# Altium PCB 主板-0915改综合.PcbDoc (part 3 of 3)
Units mm, origin at the board's own origin, x right, y up, seen from the top; angles counter-clockwise.
Board outline 97.69 x 103.45 mm, 2 copper layers (Top Layer, Bottom Layer); 78 components, 74 nets, 243 pads, 282 vias.
Unrouted connection lines stored in the file: 6.
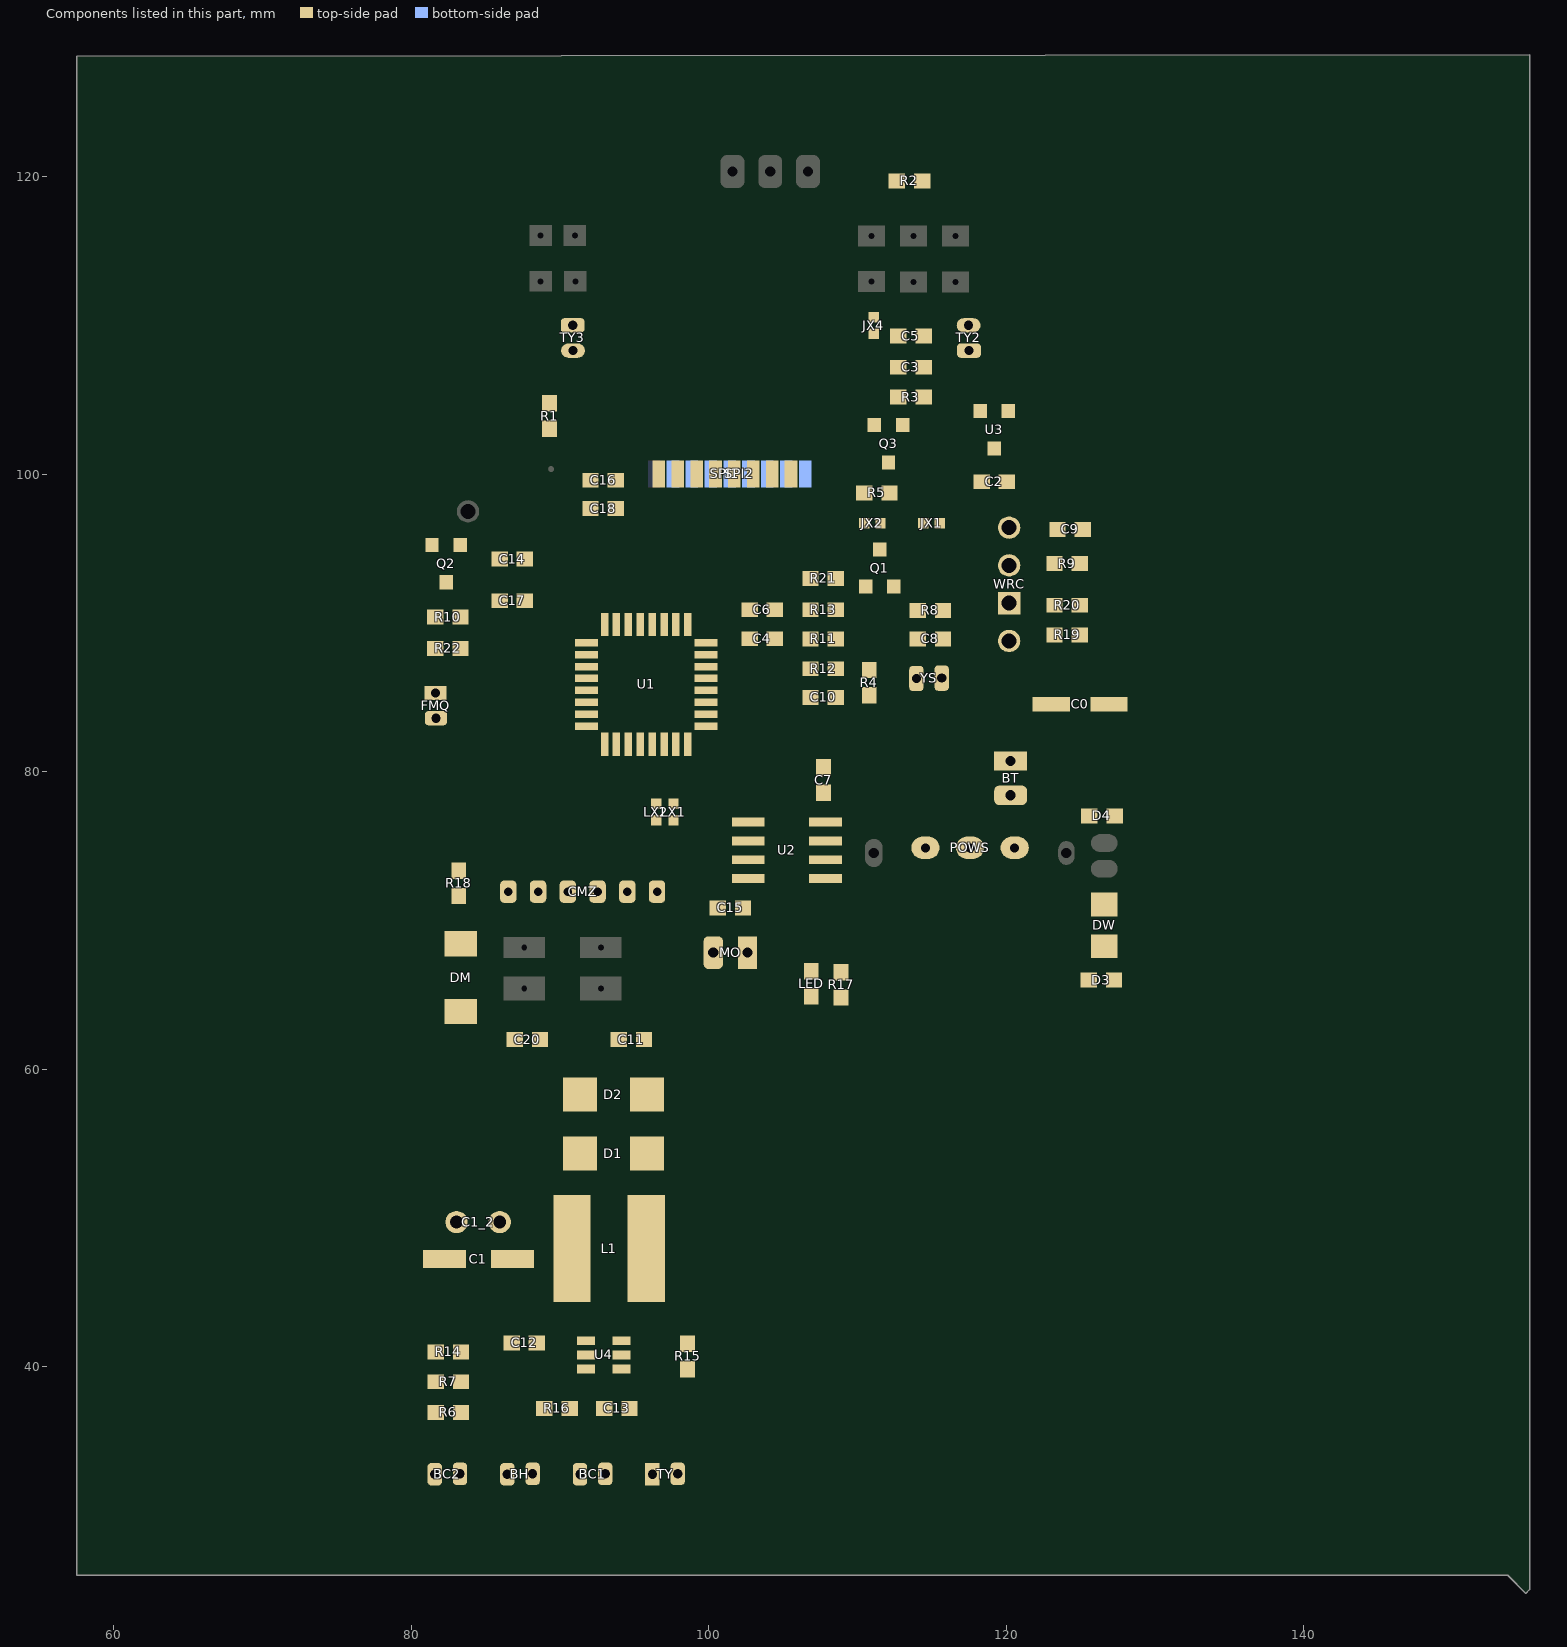
[diagram p3: the components of this part, seen from the top]

## Polygon pours and split planes (outlines as drawn)
GND on Bottom Layer "Top Layer-No Net" (solid, remove dead copper, pour order 3): 90.764,111.456 85.912,111.456 85.912,99.977 85.934,99.955 85.878,99.899 83.245,99.899 82.628,99.899 79.984,97.255 79.969,97.24 79.969,62.485 79.969,62.155 80.578,61.545 80.807,61.317 84.515,61.317 84.515,60.961 85.862,59.615 86.09,59.386 86.09,55.195 85.76,55.195 84.033,53.468 83.703,53.798 80.502,53.798 80.223,53.798 79.893,53.468 79.918,53.443 79.918,52.046 84.312,52.046 85.557,50.801 85.785,50.573 85.785,46.61 85.785,45.239 85.557,45.01 84.998,44.451 84.592,44.451 80.553,44.451 80.299,44.705 80.02,44.426 80.02,43.994 80.02,31.556 79.984,31.521 79.994,31.511 79.994,30.786 80.121,30.786 80.401,30.507 80.629,30.278 80.858,30.278 81.227,30.278 81.26,30.245 98.308,30.245 98.884,30.245 99.044,30.405 99.527,30.888 99.527,30.913 99.527,31.469 99.584,31.527 99.584,60.15 99.584,60.587 100.568,61.571 101.102,62.104 101.178,62.104 121.292,62.104 121.315,62.126 121.388,62.053 121.726,62.053 121.828,62.053 122.438,61.444 122.59,61.291 122.59,60.758 122.59,58.955 122.768,58.777 122.768,58.142 122.819,58.142 123.276,57.685 123.454,57.507 123.911,57.507 124.266,57.507 124.368,57.405 126.73,57.405 127.467,57.405 128.076,58.015 128.484,58.423 128.484,59.442 128.484,97.022 127.106,98.401 125.409,98.401 123.835,99.976 123.748,99.889 122.295,99.889 122.295,99.994 122.234,100.055 122.184,100.106 122.184,111.456 115.275,111.456 115.224,111.507 115.249,111.482 115.249,105.03 115.224,105.03 113.903,103.709 113.751,103.557 93.812,103.557 92.796,103.557 92.008,104.344 90.764,105.589 90.764,107.113 90.764,111.075 91.119,111.431
GND on Top Layer "Top Layer-No Net" (hatched 90Degree grid 0.508 track 0.254, remove dead copper, pour order 6): 99.619,34.976 79.978,34.976 80.003,35.001 80.003,46.05 85.414,46.05 85.464,46.101 85.49,46.126 85.49,50.825 85.49,50.876 85.388,50.978 85.16,51.206 81.985,51.206 81.883,51.206 81.146,50.47 81.146,49.682 81.146,48.641 80.003,48.641 80.003,53.823 80.054,53.873 80.308,54.127 80.308,54.153 84.22,54.153 84.474,54.407 86.455,56.388 86.531,56.388 86.531,59.588 86.379,59.741 85.21,60.909 83.89,60.909 80.664,60.909 79.978,61.595 80.019,61.636 80.019,78.267 80.019,78.628 80.207,78.816 80.22,78.829 80.581,78.829 83.018,78.829 83.019,78.83 83.019,81.36 80.675,81.36 80.644,81.39 80.628,81.407 80.359,81.407 80.359,81.483 80.029,81.813 80.019,81.823 80.019,82.006 80.019,97.28 81.453,98.713 83.178,98.713 83.178,98.806 84.194,99.822 84.402,100.03 86.019,100.03 86.019,112.141 86.857,112.979 90.189,112.979 90.189,105.385 92.119,103.454 92.373,103.708 111.398,103.708 113.1,103.708 114.725,105.334 114.801,105.41 114.801,112.319 122.193,112.319 122.294,112.42 122.33,112.385 122.33,99.913 123.88,99.913 125.114,98.679 125.342,98.45 127.019,98.45 127.115,98.45 128.519,97.047 128.568,96.997 128.568,82.118 128.568,81.712 128.467,81.61 128.238,81.382 128.136,81.382 125.521,81.382 125.499,81.36 125.499,78.86 127.751,78.86 127.781,78.83 127.794,78.816 128.263,78.816 128.263,78.715 128.492,78.486 128.519,78.459 128.519,78.147 128.519,65.175 128.543,65.151 127.959,64.567 123.666,64.567 123.539,64.694 121.964,63.119 121.964,62.154 120.008,62.154 119.958,62.103 119.907,62.154 101.289,62.154 100.577,62.154 99.917,61.493 99.619,61.195 99.619,60.174 99.619,35.001

## Keep-outs
Keep-Out Layer:
  circle w0.1: c82.557,57.679 r1.45
  circle w0.1: c119.262,119.579 r1.45
  circle w0.1: c89.13,119.579 r1.45
  lines w0.1: 80,58.793 80,78.216 cw(c80.562,78.216) 80.562,78.778 ; 80,59.154 80,31.494 ccw(c81.276,31.494) 81.276,30.218 98.326,30.218 ccw(c98.318,31.5) 99.6,31.5 99.6,60.123 cw(c101.577,60.123) 101.577,62.1 121.53,62.1 cw(c121.53,60.884) 122.746,60.884 122.746,59.436 ccw(c124.8,59.436) 124.8,57.382 ; 80,81.955 80,97.229 85.95,99.929 86,99.979 86,119.634 cw(c88.245,119.634) 88.245,121.879 ; 80.01,81.955 ccw(c80.626,81.955) 80.626,81.339 ; 80.562,78.779 83,78.779 ; 80.626,81.339 83,81.339 ; 83,78.809 83,81.309 ; 88.195,121.879 90.922,121.879 92.431,120.371 99.187,120.371 100.695,121.879 107.458,121.879 108.737,120.599 111.76,120.599 113.04,121.879 120.141,121.879 ; 94.25,66.232 86.1,66.232 86.1,67.462 94.25,67.462 ; 94.3,66.232 94.3,67.462 ; 119.941,121.879 cw(c119.941,119.57) 122.25,119.57 122.25,100.029 122.311,99.862 128.5,96.996 128.5,81.869 ; 124.8,57.382 126.467,57.382 ccw(c126.467,59.415) 128.5,59.415 128.5,78.096 ; 125.48,78.809 125.48,81.309 ; 125.495,78.779 127.787,78.779 ; 125.495,81.339 127.94,81.339 ccw(c127.94,81.899) 128.5,81.899 ; 127.787,78.779 cw(c127.787,78.066) 128.5,78.066 ; 87.757,113.673 87.757,115.333 91.825,115.333 91.825,113.673 87.757,113.673 ; 93.218,106.274 94.005,105.486 107.442,105.486 108.356,106.401 108.356,117.043 107.239,118.161 94.082,118.161 93.218,117.297 93.218,106.274 ; 109.728,113.673 109.728,115.333 118.085,115.333 118.085,113.673 109.728,113.673
  lines w0.15: 89.535,65.801 89.535,64.668 90.805,64.668 ; 119.236,67.555 119.685,67.107

## Other copper
Top Layer:
  rectangle net NetC4_1: 98.4,67.054 100.046,70.714
  rectangle net NetC4_1: 99.314,65.049 100.635,69.139
  rectangle net NetC4_1: 100.178,65.634 101.194,76.835
  rectangle net NetC4_2: 103.581,65.405 105.029,69.825
  rectangle net NetC4_2: 102.189,65.583 103.759,74.143
  rectangle net 8.4V: 120.32,67.589 122.346,75.566
  rectangle net 8.4V: 120.345,73.406 122.174,75.514
  rectangle net BT: 121.488,76.759 122.453,78.867
  rectangle net BT: 115.087,65.938 118.059,73.203
  rectangle net BT: 113.817,72.542 117.983,77.14
  rectangle net GND: 106.248,80.493 118.415,82.525
  rectangle net GND: 118.262,80.01 124.003,82.88
  rectangle net BT: 106.985,76.759 121.641,78.765
  rectangle net NetC4_1: 100.635,75.082 103.149,76.632
  rectangle net BT: 114.122,63.83 116.967,66.116
  rectangle net GND: 86.563,36.373 88.951,38.622
  rectangle net GND: 87.249,38.658 89.75,40.615
  rectangle net 5V: 86.258,51.664 87.884,54.381
  rectangle net GND: 101.6,77.902 105.125,81.686
  rectangle net 5V: 89.764,42.367 91.008,45.009
  rectangle net GND: 94.183,31.4 96.723,34.849
Bottom Layer:
  rectangle net GND: 100.381,79.781 101.638,80.645
  rectangle net GND: 99.873,78.562 101.625,80.315
  rectangle net GND: 101.346,78.562 105.207,81.61
  rectangle net GND: 109.118,64.338 112.624,66.116
  rectangle net GND: 110.109,64.338 112.624,72.187
  rectangle net BT: 115.214,66.98 117.983,69.266
  rectangle net GND: 85.95,43.917 88.138,55.093
  rectangle net NetC4_1: 98.273,67.513 98.781,68.428
  rectangle net NetC4_1: 98.654,66.98 100.99,68.834
  rectangle net NetC4_1: 100.279,66.167 100.94,70.51
  rectangle net NetC4_2: 102.159,68.123 103.683,71.399
  rectangle net NetC4_2: 102.21,65.862 105.131,69.393
  rectangle net GND: 85.788,39.751 89.484,41.453
  rectangle net BT: 115.087,68.758 117.907,72.822
  rectangle net 8.4V: 119.583,67.869 122.301,74.447
  rectangle net 8.4V: 120.32,73.406 122.606,75.717
  rectangle net BT: 114.833,73.914 117.704,77.572
  rectangle net GND: 104.572,79.223 106.172,81.432
  rectangle net GND: 105.639,80.315 121.488,82.499
  rectangle net BT: 106.832,77.013 121.742,78.842
  rectangle net GND: 106.07,100.432 107.798,102.464
  rectangle net GND: 86.106,63.373 88.951,64.643
  rectangle net GND: 89.023,37.059 91.08,40.437
  rectangle net GND: 87.173,36.322 94.59,43.104
  rectangle net GND: 87.325,41.91 92.481,62.992
  rectangle net GND: 91.262,51.283 94.894,63.703
  rectangle net GND: 94.234,42.164 95.25,52.502
  rectangle net GND: 82.448,51.308 86.589,53.086
  rectangle net GND: 84.201,52.375 87.579,54.153
  rectangle net GND: 85.344,52.984 88.722,54.762

## Silkscreen, mask and mechanical layers (free items; w line width, h text height)
Top Overlay:
  circle w0.16: c125.175,84.532 r2.5
  circle w0.18: c84.556,47.346 r3.15
  lines w0.16: 109.652,95.987 109.652,97.434 112.37,97.434 112.37,95.987 109.652,95.987 ; 110.338,108.737 110.338,111.277 111.836,111.277 111.836,108.737 110.338,108.737 ; 113.64,95.987 113.64,97.434 116.281,97.434 116.281,95.987 113.64,95.987
  lines w0.2: 94.894,102.006 94.894,105.08 ; 94.894,118.389 94.894,120.142 ; 107.29,101.776 107.29,105.029
  lines w0.22: 94.78,30.582 98.628,30.582 ; 117.096,63.629 120.5,63.629 ; 117.125,63.598 117.125,68.729 ; 117.125,68.727 111.121,68.727 111.121,76.116 123.999,76.116 ; 120.5,63.598 120.5,68.729 ; 120.525,68.729 123.973,68.727 123.973,76.116 ; 122.475,81.748 127.825,81.748 ; 122.475,81.823 122.475,85.95 123.778,87.253 ; 123.825,87.273 127.85,87.273 127.85,81.773 ; 127.85,81.779 127.875,81.804 ; 81.198,45.904 83.067,44.035 87.917,44.035 87.924,50.635 81.198,50.635 81.198,45.904
  text "G-" at 97.739,118.745 h1.3
  text "-R" at 108.331,118.72 h1.3
  text "BC2" at 92.837,116.586 h0.85 r90
  text "OUT1" at 87.325,116.103 h0.85 r90
  text "GND" at 119.482,113.335 h1 r90
  text "HWPOW" at 109.601,112.37 h0.9 r90
  text "BC1" at 87.376,111.938 h0.9 r90
  text "M1" at 92.354,99.314 h1.6
  text "GND" at 84.861,97.155 h0.9
  text "CE" at 99.67,96.698 h0.9 r90
  text "IRQ" at 106.045,95.936 h0.9 r90
  text "3V3" at 97.028,95.809 h0.9 r90
  text "GND" at 98.374,95.809 h0.9 r90
  text "SCK" at 102.184,95.733 h0.9 r90
  text "CSN" at 100.889,95.656 h0.9 r90
  text "MOSI" at 103.429,95.148 h0.9 r90
  text "MISO" at 104.699,95.047 h0.9 r90
  text "SWIM/FM" at 113.309,93.548 h0.8
  text "16" at 92.38,89.637 h0.7 r90
  text "RST" at 119.151,86.309 h0.8
  text "+" at 120.066,83.642 h1.8
  text "1" at 100.609,81.661 h0.8
  text "+" at 122.809,77.445 h2.5
  text "+" at 113.182,76.708 h2.5
  text "+" at 116.916,76.683 h2.5
  text "AM" at 90.957,73.889 h1 r90
  text "Y>" at 92.964,73.889 h1 r90
  text "GN" at 97.028,73.812 h1 r90
  text "3.3V" at 87.02,73.787 h1 r90
  text "Y30" at 88.951,73.787 h1 r90
  text "<Z" at 94.996,73.762 h1 r90
  text "NTC" at 125.552,73.381 h0.8 r90
  text "-" at 125.806,71.145 h2.3
  text "BAT" at 116.484,69.977 h1 r90
  text "8.4V" at 121.818,69.672 h1 r90
  text "SWIM" at 86.309,69.367 h0.8
  text "RST" at 91.796,69.291 h0.8
  text "+" at 96.19,64.999 h2
  text "5V" at 89.383,62.941 h1
  text "+" at 92.024,62.433 h2
  text "-" at 86.665,62.306 h2.2
  text "+" at 80.594,43.459 h2
  text "+" at 99.187,34.823 h1.5 r90
Bottom Overlay:
  circle w0.2: c84.497,49.733 r2.6
  lines w0.16: 95.021,101.776 95.021,105.181 ; 96.19,95.123 96.19,93.32 96.596,92.913 104.75,92.913 105.105,93.269 105.105,95.199 ; 97.46,95.199 97.46,93.751 97.485,93.726 106.553,93.726 106.655,93.828 106.655,95.275 ; 98.6,70.028 98.6,63.119 104.369,63.119 104.369,69.875 104.521,70.028 98.628,70.028 ; 106.756,101.879 106.756,105.054
  lines w0.25: 96.063,101.956 96.063,105.029 ; 108.001,101.802 108.001,105.054
  lines w0.254: 90.932,117.069 92.024,118.161 ; 91.592,110.846 92.685,111.938 ; 91.618,111.938 92.71,110.846
  text "-G" at 99.898,118.643 h1.2
  text "38BC2" at 95.021,118.593 h0.8
  text "R-" at 110.211,118.567 h1.2
  text "38OUT" at 87.401,118.186 h0.8 r90
  text "HWPOW" at 109.576,116.713 h0.9 r90
  text "GND" at 119.609,115.976 h1 r90
  text "38BC1" at 87.452,113.309 h0.8 r90
  text "FL" at 114.427,110.414 h1.2
  text "SCK" at 101.778,98.146 h0.9 r90
  text "GND" at 107.213,98.12 h0.9 r90
  text "IRQ" at 97.917,98.095 h0.9 r90
  text "3V3" at 105.664,98.095 h0.9 r90
  text "MISO" at 99.212,98.069 h0.9 r90
  text "CE" at 104.343,98.069 h0.9 r90
  text "CSN" at 103.048,98.044 h0.9 r90
  text "GND" at 96.698,98.019 h0.9 r90
  text "MOSI" at 100.482,97.993 h0.9 r90
  text "3.3" at 118.796,95.936 h1
  text "GND" at 83.058,95.021 h1 r90
  text "SWIM" at 118.847,93.32 h1
  text "GND" at 118.593,90.932 h1
  text "RST" at 118.415,88.265 h1
  text "YS" at 112.192,85.395 h1.5
  text "BT" at 121.031,84.531 h1.5 r90
  text "+" at 123.469,77.394 h2
  text "8.4V" at 121.133,73.254 h1 r90
  text "GND" at 125.654,72.568 h1 r270
  text "BT" at 117.018,71.984 h1.4
  text "GND" at 86.004,64.11 h1.15 r180
  text "MO" at 107.544,63.652 h1.5
  text "+" at 93.37,62.255 h2.2
  text "DC 5V" at 93.091,60.681 h1.2
  text "2000MA" at 93.701,58.699 h1.2
  text "C1" at 85.166,53.315 h1.2
  text "+" at 81.458,48.87 h1.8
  text "201900909DG" at 90.018,44.399 h1 r270
  text "BH" at 88.265,34.569 h1.2
  text "B2" at 83.439,34.544 h1.2
  text "B1" at 93.015,34.544 h1.2
  text "TY" at 98.12,34.519 h1.2
Top Solder:
  lines w0.7: 103.048,76.683 101.041,76.683 ; 101.041,76.683 100.373,76.683 99.72,76.03 99.72,73.152 100.355,73.787 100.355,75.997 101.041,76.683
  lines w1: 102.26,75.616 102.26,76.505 ; 102.286,72.949 102.286,73.889